# Altium PCB PCB_Nucleo.PcbDoc
Units mm, origin at the board's own origin, x right, y up, seen from the top; angles counter-clockwise.
Board outline 152.4 x 101.6 mm, 4 copper layers (Top Layer, GND, +3V3, Bottom Layer), stack 0.603 mm thick; 63 components, 70 nets, 278 pads, 0 vias.
Unrouted connection lines stored in the file: 152.
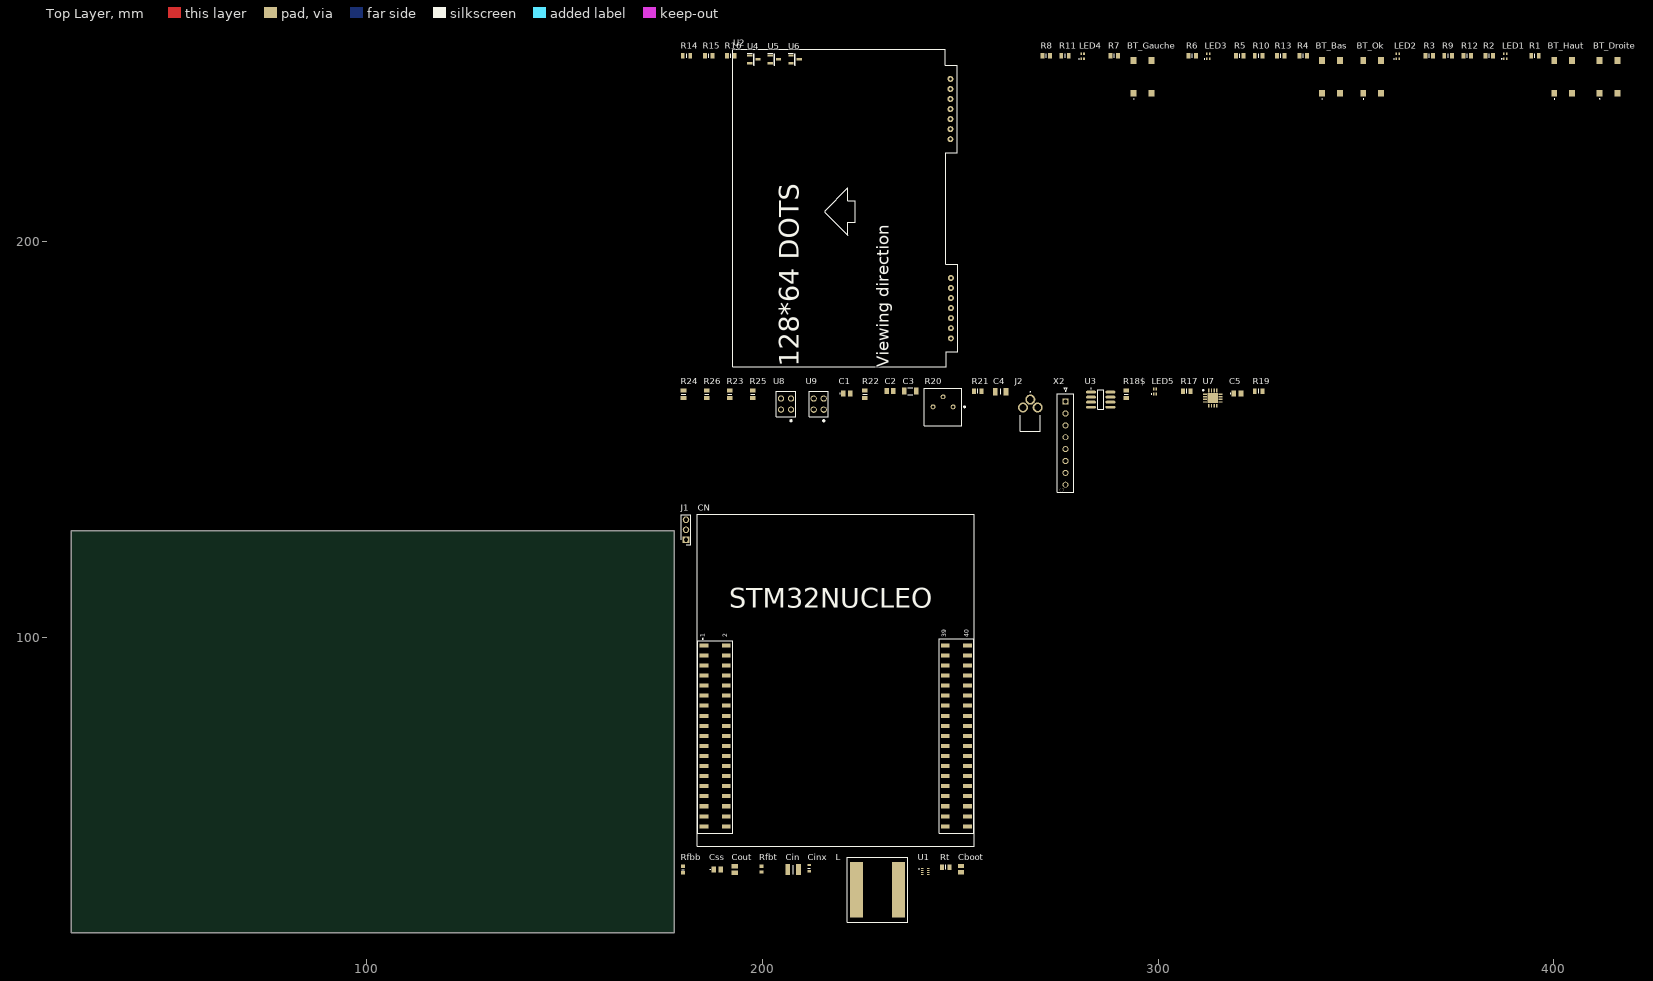
[diagram p0: Top Layer view]
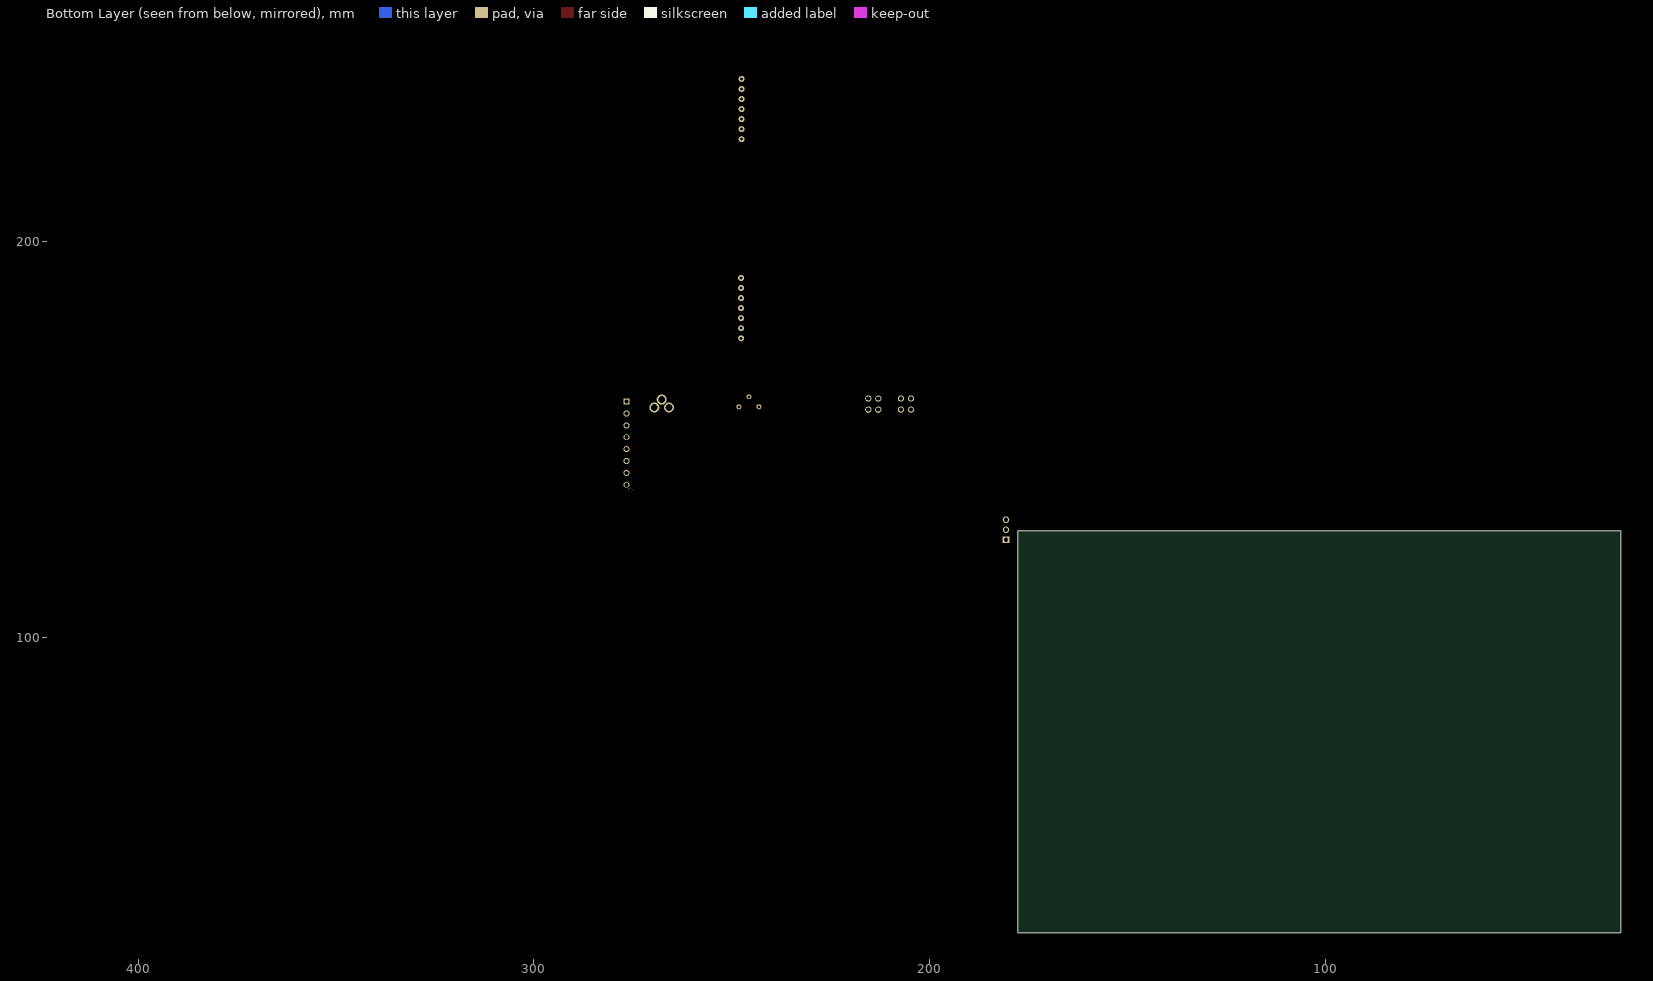
[diagram p1: Bottom Layer view, seen from below]

## Layer stack, top to bottom
Top Solder: solder mask 0.0102, Solder Resist, Dk 3.5
Top Layer: signal copper 0.0356
Dielectric 2: prepreg 0.0711, PP-006, Dk 4.1
GND: signal copper 0.035
Dielectric 1: dielectric 0.32, FR-4, Dk 4.8
+3V3: signal copper 0.035
Dielectric 3: prepreg 0.0711, PP-006, Dk 4.1
Bottom Layer: signal copper 0.0356
Bottom Solder: solder mask 0.0102, Solder Resist, Dk 3.5

## Board outline
25.4,25.4 177.8,25.4 177.8,127 25.4,127

## Design rules (kind name [scope] priority, off if disabled: settings)
Clearance [All] p1: gap=0.2 ignorepadtopadclearanceinfootprint=FALSE
MinimumAnnularRing [All] p1: minimumring=0.4
PolygonConnect [All] p1: connectstyle=Relief reliefconductorwidth=0.254 reliefentries=4 polygonreliefangle="90 Angle" airgapwidth=0.254
RoomDefinition IO_Carte_Nucleo_ [InComponentClass('IO_Carte_Nucleo_')] p1: confinementstyle=ConfineIn formatcopy=TRUE lockcomponents=FALSE outline 178.943,167.259 423.037,167.259 423.037,250.698 178.943,250.698
RoomDefinition IO_Carte_Nucleo2_ [InComponentClass('IO_Carte_Nucleo2_')] p2: confinementstyle=ConfineIn formatcopy=TRUE lockcomponents=FALSE outline 178.943,135.255 328.168,135.255 328.168,165.989 178.943,165.989
RoomDefinition Connecteur_Nucleo [InComponentClass('Connecteur_Nucleo')] p3: confinementstyle=ConfineIn formatcopy=TRUE lockcomponents=FALSE outline 178.943,46.99 253.873,46.99 253.873,134.112 178.943,134.112
RoomDefinition Alimentation [InComponentClass('Alimentation')] p4: confinementstyle=ConfineIn formatcopy=TRUE lockcomponents=FALSE outline 178.943,26.924 256.54,26.924 256.54,45.72 178.943,45.72
RoutingVias [All] p1: holewidth=0.25 width=0.6 viastyle="Through Hole" minholewidth=0.25 minwidth=0.6 maxholewidth=0.25 maxwidth=0.6
SolderMaskExpansion [All] p1: expansion=0.102 istentingtop=FALSE
Width [All] p1: maxlimit=0.2 minlimit=0.2 preferedwidth=0.2
30 further rules are at their usual default settings.

## Classes and differential pairs
component class IO_Carte_Nucleo_: BT_Bas BT_Droite BT_Gauche BT_Haut BT_Ok Joystick LED1 LED2 LED3 LED4 R1 R2 R3 R4 R5 R6 R7 R8 R9 R10 R11 R12 R13 R14 R15 R16 U2 U4 U5 U6
component class IO_Carte_Nucleo2_: C1 C2 C3 C4 C5 J2 LED5 R17 R18$ R19 R20 R21 R22 R23 R24 R25 R26 U U3 U7 U8 U9 X2
component class Connecteur_Nucleo: CN J1
component class Alimentation: Cboot Cin Cinx Cout Css L Rfbb Rfbt Rt U1

## Components (designator, comment, footprint, x,y, rotation, side; value= is the part's Value field where it differs from the comment)
BT_Bas "TS05-66-50-BK-260-SMT-67" TS056650BK260SMT67 343.662,241.681 r90 top
BT_Droite "TS05-66-50-BK-260-SMT-67" TS056650BK260SMT67 413.766,241.681 r90 top
BT_Gauche "TS05-66-50-BK-260-SMT-67" TS056650BK260SMT67 296.037,241.681 r90 top
BT_Haut "TS05-66-50-BK-260-SMT-67" TS056650BK260SMT67 402.336,241.681 r90 top
BT_Ok "TS05-66-50-BK-260-SMT-67" TS056650BK260SMT67 354.076,241.681 r90 top
C1 "C0805X474K3RACAUTO7210" C0805 221.361,161.671 r0 top
C2 "C0805X105K5RACAUTO" CAPC2012X145N 232.283,162.306 r0 top
C3 "12065C503JAT2A" CAPC3216X94N 237.363,162.306 r0 top
C4 "GRM31CR60J227ME11L" CAPC3216X190N 260.223,162.179 r0 top
C5 "C0805X474K3RACAUTO7210" C0805 320.04,161.671 r0 top
Cboot "C0805C104K5RAC7411" CAPC2012X88N 250.19,41.529 r90 top
Cin "UMR325AC7106MM-P" CAPC3225X280N 207.772,41.402 r0 top
Cinx "CGA3E2X7R1H104K080AA" CAPC1608X90N 211.836,41.783 r90 top
CN "" "Nucleo-conn-SMD - sans 3D" 218.567,75.184 r0 top
Cout "GRM21BR60G107ME15L" CAPC2012X145N 193.04,41.402 r90 top
Css "C0805C333J2RACTU" C0805 188.595,41.402 r0 top
J1 "XJ8B-0311" HDRV3W64P0X254_1X3_760X250X580P 180.721,124.714 r90 top
J2 "MJ1-2503A" MJ12503A 267.716,160.147 r90 top
L "74439370100" 74439370100 229.108,36.322 r90 top
LED1 "HSMF-C165" HSMF-C163 387.731,246.888 r90 top
LED2 "HSMF-C165" HSMF-C163 360.553,246.888 r90 top
LED3 "HSMF-C165" HSMF-C163 312.674,246.888 r90 top
LED4 "HSMF-C165" HSMF-C163 280.924,246.888 r90 top
LED5 "HSMF-C165" HSMF-C163 299.212,162.179 r90 top
R1 "CR0805-FX-1200ELF" RESC2012X60N 395.224,247.015 r0 top
R2 "CR0805-FX-1200ELF" RESC2012X60N 383.667,247.015 r0 top
R3 "CR0805-FX-1200ELF" RESC2012X60N 368.554,247.015 r0 top
R4 "CR0805-FX-1200ELF" RESC2012X60N 336.677,247.015 r0 top
R5 "CR0805-FX-1200ELF" RESC2012X60N 320.675,247.015 r0 top
R6 "CR0805-FX-1200ELF" RESC2012X60N 308.61,247.015 r0 top
R7 "CR0805-FX-1200ELF" RESC2012X60N 288.925,247.015 r0 top
R8 "CR0805-FX-1200ELF" RESC2012X60N 271.78,247.015 r0 top
R9 "CR0805-JW-103ELF" RESC2012X60N 373.253,247.015 r0 top
R10 "CR0805-JW-103ELF" RESC2012X60N 325.374,247.015 r0 top
R11 "CR0805-JW-103ELF" RESC2012X60N 276.479,247.015 r0 top
R12 "CR0805-JW-103ELF" RESC2012X60N 378.079,247.015 r0 top
R13 "CR0805-JW-103ELF" RESC2012X60N 330.962,247.015 r0 top
R14 "CR0805-JW-103ELF" RESC2012X60N 180.848,247.015 r0 top
R15 "CR0805-JW-103ELF" RESC2012X60N 186.436,247.015 r0 top
R16 "CR0805-JW-103ELF" RESC2012X60N 192.024,247.015 r0 top
R17 "CR0805-FX-1200ELF" RESC2012X60N 307.213,162.306 r0 top
R18$ "CR0805-FX-1200ELF" RESC2012X60N 291.973,161.544 r90 top
R19 "CR0805-JW-103ELF" RESC2012X60N 325.374,162.306 r0 top
R20 "3386P-1-103LF" 3386P_1 240.919,153.543 r0 top
R21 "CRCW08050000Z0EAC" RESC2012X60N 254.381,162.306 r0 top
R22 "CHP0805AFX-10R0ELF" RESC2012X60N 225.933,161.544 r90 top
R23 "CR0805-FX-1000ELF" RESC2012X60N 191.77,161.544 r90 top
R24 "CR0805-JW-103ELF" RESC2012X60N 180.086,161.544 r90 top
R25 "CR0805-FX-1000ELF" RESC2012X60N 197.612,161.544 r90 top
R26 "CR0805-JW-103ELF" RESC2012X60N 185.928,161.544 r90 top
Rfbb "CRCW060310K0FKEAC" RESC1608X55N 179.959,41.402 r90 top
Rfbt "CRCW060330K9FKEA" RESC1608X50N 199.771,41.529 r90 top
Rt "CR0805-FX-6192ELF" RESC2012X60N 246.38,42.037 r0 top
U1 "TPS62932DRLR" TPS62932DRLR 241.173,40.894 r0 top
U2 "NHD-C12864A1Z-FS(RGB)-FBW-HT1" NHD-C12864A1Z-FS(RGB)-FBW-HT1 247.396,178.435 r90 top
U3 "LM386M-1/NOPB" TI-D8_M 285.496,160.147 r0 top
U4 "IRLML6344TRPBF" SOT95P237X112-3N 197.866,246.126 r0 top
U5 "IRLML6344TRPBF" SOT95P237X112-3N 203.073,246.126 r0 top
U6 "IRLML6344TRPBF" SOT95P237X112-3N 208.28,246.126 r0 top
U7 "ADXL335BCPZ-RL7" QFN65P400X400X150-17N-D 313.817,160.528 r0 top
U8 "ITR-20001_T" ITR20001T 207.264,157.607 r90 top
U9 "ITR-20001_T" ITR20001T 215.519,157.607 r90 top
X2 "216571-2008" 216571-YY08 276.606,159.639 r90 top

## Footprints (in the part's own frame and the unit in brackets; to place one, negate y for a bottom-side part, rotate by r counter-clockwise, add the part's x,y. Pads: shape width x height; smd on the part's side, far side on the other; paste and mask are expansions set on the pad)
3386P_1 [mm]
  round 1.25 hole 0.75: 1(7.305,4.78) 2(4.765,7.32) 3(2.225,4.78)
  silkscreen extent 0,0 10.36,9.53
216571-YY08 [mm]
  rect 1.52x1.52 hole 1.02: 1(0,0)
  round 1.52 hole 1.02: 2(-3,0) 3(-6,0) 4(-9,0) 5(-12,0) 6(-15,0) 7(-18,0) 8(-21,0)
  round 1.02 hole 1.02 unplated: 9(-22.28,0.98)
  silkscreen extent -22.93,-2.09 3.5,2.09, body extent -22.93,-2.09 3.25,2.09, height 10.01
74439370100 [mm]
  rect 14.1x3.3 smd: 1(0,-5.3) 2(0,5.3)
  silkscreen extent -8.2,-7.7 8.2,7.7, body extent -8.2,-7.7 8.2,7.7, height 10.1
C0805 [mm]
  rect 1.15x1.45 smd: 1(-0.9,0) 2(0.9,0)
  silkscreen extent -1.8,-0.05 -1.7,0.05, body extent -1.15,-0.78 1.15,0.77, height 0.98
CAPC1608X90N [mm]
  rect 0.54x0.94 smd: 1(-0.8,0) 2(0.8,0)
  silkscreen extent 0,-0.3 0,0.3, body extent -0.8,-0.4 0.8,0.4, height 0.9
CAPC2012X88N [mm]
  rect 1.02x1.47 smd: 1(-0.8,0) 2(0.8,0)
  body extent -1,-0.63 1,0.63, height 0.88
CAPC2012X145N [mm]
  rect 1.14x1.57 smd: 1(-0.81,0) 2(0.81,0)
  body extent -1.17,-0.78 1.18,0.77, height 1.45
CAPC3216X94N [mil]
  rect 44x71 smd: 1(-59,0) 2(59,0)
  silkscreen extent -24,-35 24,35
CAPC3216X190N [mm]
  rect 1.22x1.92 smd: 1(-1.35,0) 2(1.35,0)
  silkscreen extent 0,-0.7 0,0.7, body extent -1.6,-0.8 1.6,0.8, height 1.9
CAPC3225X280N [mm]
  rect 1.22x2.82 smd: 1(-1.35,0) 2(1.35,0)
  silkscreen extent 0,-1.15 0,1.15, body extent -1.6,-1.25 1.6,1.25, height 2.8
HDRV3W64P0X254_1X3_760X250X580P [mm]
  rect 1.65x1.65 hole 1.1: 1(0,0)
  round 1.65 hole 1.1: 2(2.54,0) 3(5.08,0)
  silkscreen extent -1.26,-1.25 6.34,1.25, body extent -1.26,-1.25 6.34,1.25, height 5.8
HSMF-C163 [mm]
  rect 0.7x0.4 smd: 1(-0.65,0.35) 2(-0.65,-0.35) 3(0.65,0.35) 4(0.65,-0.35)
  silkscreen extent -0.72,0.83 -0.58,0.97
ITR20001T [mm]
  round 1.575 hole 1.05: 1(0,0) 2(0,2.54) 3(2.8,2.54) 4(2.8,0)
  silkscreen extent -3,-1.18 4.6,3.72, body extent -1.8,-1.18 4.6,3.72, height 6.9
MJ12503A [mm]
  round 2.55 hole 1.7: 1(0,0) 2(-2,-1.85) 3(-2,1.85)
  round 0.6 hole 1.2 unplated: MH1(-4.5,0)
  silkscreen extent -8,-2.5 2,2.5, body extent -11,-2.6 0.75,2.6, height 5.1
NHD-C12864A1Z-FS(RGB)-FBW-HT1 [mil]
  round 60 hole 30: 1(-110,-10) 2(-10,-10) 3(90,-10) 4(190,-10) 5(290,-10) 6(390,-10) 7(490,-10) 8(1870,-5) 9(1970,-5) 10(2070,-5) 11(2170,-5) 12(2270,-5) 13(2370,-5) 14(2470,-5)
  silkscreen extent -395,-80 2765,2160
"Nucleo-conn-SMD - sans 3D" [mm] "Interface Nucleo morpho connectors"
  rect 2.22x1.02 smd: 1(-33.306,22.86) 2(-27.654,22.86) 3(-33.306,20.32) 4(-27.654,20.32) 5(-33.306,17.78) 6(-27.654,17.78) 7(-33.306,15.24) 8(-27.654,15.24) 9(-33.306,12.7) 10(-27.654,12.7) 11(-33.306,10.16) 12(-27.654,10.16) 13(-33.306,7.62) 14(-27.654,7.62) 15(-33.306,5.08) 16(-27.654,5.08) 17(-33.306,2.54) 18(-27.654,2.54) 19(-33.306,0) 20(-27.654,0) 21(-33.306,-2.54) 22(-27.654,-2.54) 23(-33.306,-5.08) 24(-27.654,-5.08) 25(-33.306,-7.62) 26(-27.654,-7.62) 27(-33.306,-10.16) 28(-27.654,-10.16) 29(-33.306,-12.7) 30(-27.654,-12.7) 31(-33.306,-15.24) 32(-27.654,-15.24) 33(-33.306,-17.78) 34(-27.654,-17.78) 35(-33.306,-20.32) 36(-27.654,-20.32) 37(-33.306,-22.86) 38(-27.654,-22.86) 39(27.654,22.86) 39(27.654,22.86) 40(33.306,22.86) 41(27.654,20.32) 42(33.306,20.32) 43(27.654,17.78) 44(33.306,17.78) 45(27.654,15.24) 46(33.306,15.24) 47(27.654,12.7) 48(33.306,12.7) 49(27.654,10.16) 50(33.306,10.16) 51(27.654,7.62) 52(33.306,7.62) 53(27.654,5.08) 54(33.306,5.08) 55(27.654,2.54) 56(33.306,2.54) 57(27.654,0) 58(33.306,0) 59(27.654,-2.54) 60(33.306,-2.54) 61(27.654,-5.08) 62(33.306,-5.08) 63(27.654,-7.62) 64(33.306,-7.62) 65(27.654,-10.16) 66(33.306,-10.16) 67(27.654,-12.7) 68(33.306,-12.7) 69(27.654,-15.24) 70(33.306,-15.24) 71(27.654,-17.78) 72(33.306,-17.78) 73(27.654,-20.32) 74(33.306,-20.32) 75(27.654,-22.86) 76(33.306,-22.86)
  silkscreen extent -35,-27.94 35,56.03, body extent -34.02,-24.16 33.97,24.1, height 7.37
QFN65P400X400X150-17N-D [mm]
  rect 0.95x0.35 smd: 1(-1.95,0.975) 2(-1.95,0.325) 3(-1.95,-0.325) 4(-1.95,-0.975) 9(1.95,-0.975) 10(1.95,-0.325) 11(1.95,0.325) 12(1.95,0.975)
  rect 0.35x0.95 smd: 5(-0.975,-1.95) 6(-0.325,-1.95) 7(0.325,-1.95) 8(0.975,-1.95) 13(0.975,1.95) 14(0.325,1.95) 15(-0.325,1.95) 16(-0.975,1.95)
  rect 2.55x2.55 smd: 17(0,0)
  silkscreen extent -2.59,1.79 -2.26,2.11, body extent -2.05,-2.05 2.05,2.05, height 1.5
RESC1608X50N [mm]
  rect 0.85x1 smd: 1(-0.75,0) 2(0.75,0)
  body extent -0.79,-0.43 0.79,0.43, height 0.5
RESC1608X55N [mm]
  rect 0.9x0.95 smd: 1(-0.8,0) 2(0.8,0)
  silkscreen extent 0,-0.3 0,0.3, body extent -0.8,-0.4 0.8,0.4, height 0.55
RESC2012X60N [mm]
  rect 1x1.4 smd: 1(-0.95,0) 2(0.95,0)
  silkscreen extent 0,-0.53 0,0.53, body extent -1,-0.63 1,0.63, height 0.5
SOT95P237X112-3N [mm]
  rect 1.3x0.6 smd: 1(-1.05,0.95) 2(-1.05,-0.95) 3(1.05,0)
  silkscreen extent -1.7,-1.46 0.05,1.5, body extent -1.18,-1.46 1.18,1.46, height 1.12
TI-D8_M [mm] "SOIC, 8-Leads, Body 5x4mm, Pitch 1.27mm, IPC Low Density"
  oval 2.5x0.7 smd: 1(-2.45,1.905) 2(-2.45,0.635) 3(-2.45,-0.635) 4(-2.45,-1.905) 5(2.45,-1.905) 6(2.45,-0.635) 7(2.45,0.635) 8(2.45,1.905)
  silkscreen extent -2.57,-2.5 0.8,2.93, body extent -2,-2.5 2,2.5, height 1.75
TPS62932DRLR [mm]
  rect 0.67x0.3 smd: 1(-0.74,0.75) 2(-0.74,0.25) 3(-0.74,-0.25) 4(-0.74,-0.75) 5(0.74,-0.75) 6(0.74,-0.25) 7(0.74,0.25) 8(0.74,0.75)
  silkscreen extent -1.65,0.6 -1.55,0.7, body extent -0.6,-1.05 0.6,1.05, height 0.7
TS056650BK260SMT67 [mm]
  rect 1.75x1.5 smd: 1(-4.125,2.25) 2(-4.125,-2.25) 3(4.125,2.25) 4(4.125,-2.25)
  silkscreen extent -5.6,2.15 -5.5,2.25

## Part data
BT_Bas BT_Droite BT_Gauche BT_Haut BT_Ok: "6 x 6 mm, 4.3 ~ 8 mm Actuator Height, 100 ~ 260 gf, Surface Mount, IP67, SPST, Tactile Switch", Supplier Part Number 1=179-TS056650260SMT67, Datasheet Link=https://www.cuidevices.com/product/resource/ts05.pdf, Height=5.2mm, Supplier 1=Mouser
C1 C2 C5: "Capacitor", Manufacturer_Name=KEMET
  C1 C5: Datasheet Link=https://content.kemet.com/datasheets/KEM_C1078_X7R_FT-CAP_AUTO_SMD.pdf, Height=1.1mm, Manufacturer_Part_Number=C0805X474K3RACAUTO7210
  C2: Datasheet Link=https://connect.kemet.com:7667/gateway/IntelliData-ComponentDocumentation/1.0/download/specsheet/C0805X105K5RACAUTO, Height=1.45mm, Manufacturer_Part_Number=C0805X105K5RACAUTO
C3: "Capacitor", Manufacturer_Name=AVX, Manufacturer_Part_Number=12065C503JAT2A
C4: "Capacitor", Manufacturer_Name="Murata Electronics", Datasheet Link=https://www.murata.com/products/productdetail?partno=GRM31CR60J227ME11%23, Height=1.9mm, Manufacturer_Part_Number=GRM31CR60J227ME11L
Cboot: "Multilayer Ceramic Capacitors MLCC - SMD/SMT 50V 0.1uF X7R 0805 10%", Manufacturer_Name=KEMET, Mouser2 Part Number=80-C0805C104K5RACLR, Datasheet Link=https://componentsearchengine.com//C0805C104K5RAC7411.pdf, Height=0.88mm, Manufacturer_Part_Number=C0805C104K5RAC7411, Mouser2 Price/Stock=https://www.mouser.com/Search/Refine.aspx?Keyword=80-C0805C104K5RACLR, Supplier 1=Mouser, Supplier Part Number 1=80-C0805C104K5RACLR
Cin: "Capacitor 1210 50V 10uF +-20%", Manufacturer_Name="TAIYO YUDEN", Supplier Part Number 1=83AH3992, Height=2.8mm, Manufacturer_Part_Number=UMR325AC7106MM-P, Supplier 1=Newark
Cinx: "Capacitor 0603 100nF", Manufacturer_Name=TDK, Mouser2 Part Number=810-CGA3E2X7R1H104K, Supplier Part Number 1=9214481, Datasheet Link=https://componentsearchengine.com//CGA3E2X7R1H104K080AA.pdf, Height=0.9mm, Manufacturer_Part_Number=CGA3E2X7R1H104K080AA, Mouser2 Price/Stock=https://www.mouser.com/Search/Refine.aspx?Keyword=810-CGA3E2X7R1H104K, Supplier 1=RSComponents
CN: library part CN1, "Headers & Wire Housings Surface Mount PCB Socket Strips, 0.100 pitch", Supplier Part Number 1=81P6392, ComponentLink1Description="New link", Supplier 1=Newark
Cout: "0805 100 uF 4 V ±20% Tolerance X5R Multilayer Ceramic Chip Capacitor", Manufacturer_Name="Murata Electronics", Supplier Part Number 1=8072633, Datasheet Link=https://datasheet.datasheetarchive.com/originals/distributors/DKDS-10/192999.pdf, Height=1.45mm, Manufacturer_Part_Number=GRM21BR60G107ME15L, Supplier 1="Future Electronics"
Css: "Multilayer Ceramic Capacitors MLCC - SMD/SMT 200V 0.033uF X7R 0805 5%", Manufacturer_Name=KEMET, Supplier Part Number 1=80-C0805C333J2RACTU, Datasheet Link=https://content.kemet.com/datasheets/KEM_C1002_X7R_SMD.pdf, Height=1.1mm, Manufacturer_Part_Number=C0805C333J2RACTU, Supplier 1=Mouser
J1: "Conn Unshrouded Header PL 3 POS 2.54mm Solder ST Top Entry Thru-Hole", Manufacturer_Name="Omron Electronics", Datasheet Link=https://www.omron.com/ecb/products/pdf/en-xj8.pdf, Height=5.8mm, Manufacturer_Part_Number=XJ8B-0311, Supplier 1="Arrow Electronics", Supplier Part Number 1=XJ8B-0311
J2: "Connector", Manufacturer_Name="CUI Inc.", Mouser2 Part Number=490-MJ1-2503A, Datasheet Link=https://componentsearchengine.com//MJ1-2503A.pdf, Height=5mm, Manufacturer_Part_Number=MJ1-2503A, Mouser2 Price/Stock=https://www.mouser.com/Search/Refine.aspx?Keyword=490-MJ1-2503A
L: "Fixed Inductors WE-XHMI SMD 1510 10uH 11.5A 6.5mOhms", Manufacturer_Name="Wurth Elektronik", Supplier Part Number 1=92AH7077, Datasheet Link=https://componentsearchengine.com/Datasheets/1/74439370100.pdf, Height=10mm, Manufacturer_Part_Number=74439370100, Supplier 1=Newark
LED1 LED2 LED3 LED4: "Standard LEDs - SMD Grn/Red Bi-Color", Manufacturer_Name="Avago Technologies", Mouser2 Part Number=630-HSMF-C165, Supplier Part Number 1=450991P, Datasheet Link=https://componentsearchengine.com//HSMF-C165.pdf, Manufacturer_Part_Number=HSMF-C165, Mouser2 Price/Stock=https://www.mouser.com/Search/Refine.aspx?Keyword=630-HSMF-C165, Supplier 1=RSComponents
LED5: "LED Bi-Color Green/Red 570nm/636nm 4-Pin Chip 0603 T/R", Manufacturer_Name="Avago Technologies", Mouser2 Part Number=630-HSMF-C165, Supplier Part Number 1=450991P, Datasheet Link=https://componentsearchengine.com//HSMF-C165.pdf, Manufacturer_Part_Number=HSMF-C165, Mouser2 Price/Stock=https://www.mouser.com/Search/Refine.aspx?Keyword=630-HSMF-C165, Supplier 1=RSComponents
R1 R2 R3 R4 R5 R6 R7 R8: "Res Thick Film 0805 120 Ohm 1% 1/8W ±100ppm/°C Molded SMD SMD Paper Tape on Plastic Reel", Datasheet Link=https://www.bourns.com/pdfs/chpreztr.pdf, Height=0.6mm, Supplier 1="Arrow Electronics", Supplier Part Number 1=CR0805-FX-1200ELF
R9 R10 R11 R12 R13 R14 R15 R16 R19: "BOURNS         CR0805-JW-103ELF            Surface Mount Chip Resistor, Thick Film, CR Series, 10 kohm, 125 mW,  5%, 150 V", Datasheet Link=https://componentsearchengine.com//CR0805-JW-103ELF.pdf, Height=0.6mm, Supplier 1="Arrow Electronics", Supplier Part Number 1=CR0805-JW-103ELF
R17 R18$ R22 R23 R25: "Resistor", Manufacturer_Name=Bourns, Height=0.6mm
  R17 R18$: Datasheet Link=https://www.bourns.com/pdfs/chpreztr.pdf, Manufacturer_Part_Number=CR0805-FX-1200ELF
  R22: Datasheet Link=https://www.mouser.co.uk/datasheet/2/54/chp-a-1858677.pdf, Manufacturer_Part_Number=CHP0805AFX-10R0ELF
  R23 R25: Datasheet Link=https://www.bourns.com/pdfs/chpreztr.pdf, Manufacturer_Part_Number=CR0805-FX-1000ELF
R20: "Resistor", Manufacturer_Name=Bourns, Mouser2 Part Number=652-3386P-1-103LF, Datasheet Link=https://componentsearchengine.com//3386P-1-103LF.pdf, Manufacturer_Part_Number=3386P-1-103LF, Mouser2 Price/Stock=https://www.mouser.com/Search/Refine.aspx?Keyword=652-3386P-1-103LF
R21: "Resistor", Manufacturer_Name=Vishay, Mouser2 Part Number=71-CRCW08050000Z0EAC, Datasheet Link=https://componentsearchengine.com//CRCW08050000Z0EAC.pdf, Height=0.6mm, Manufacturer_Part_Number=CRCW08050000Z0EAC, Mouser2 Price/Stock=https://www.mouser.com/Search/Refine.aspx?Keyword=71-CRCW08050000Z0EAC
R24 R26: "Resistor", Manufacturer_Name=Bourns, Mouser2 Part Number=652-CR0805-JW-103ELF, Datasheet Link=https://componentsearchengine.com//CR0805-JW-103ELF.pdf, Height=0.6mm, Manufacturer_Part_Number=CR0805-JW-103ELF, Mouser2 Price/Stock=https://www.mouser.com/Search/Refine.aspx?Keyword=652-CR0805-JW-103ELF
Rfbb: "Res Thick Film 0603 10K Ohm 1% 1/10W ±100ppm/°C Molded SMD Paper T/R", Manufacturer_Name=Vishay, Mouser2 Part Number=71-CRCW060310K0FKEAC, Datasheet Link=https://componentsearchengine.com//CRCW060310K0FKEAC.pdf, Height=0.55mm, Manufacturer_Part_Number=CRCW060310K0FKEAC, Mouser2 Price/Stock=https://www.mouser.com/Search/Refine.aspx?Keyword=71-CRCW060310K0FKEAC, Supplier 1="Arrow Electronics", Supplier Part Number 1=CRCW060310K0FKEAC
Rfbt: "Res Thick Film 0603 30.9K Ohm 1% 1/10W ±100ppm/°C Molded SMD SMD Paper T/R", Manufacturer_Name=Vishay, Datasheet Link=http://www.vishay.com/docs/20035/dcrcwe3.pdf, Height=0.5mm, Manufacturer_Part_Number=CRCW060330K9FKEA, Supplier 1="Arrow Electronics", Supplier Part Number 1=CRCW060330K9FKEA
Rt: "Resistor 0805 61.9kOhm", Manufacturer_Name=Bourns, Datasheet Link=https://www.bourns.com/pdfs/chpreztr.pdf, Height=0.6mm, Manufacturer_Part_Number=CR0805-FX-6192ELF, Supplier 1=Avnet, Supplier Part Number 1=CR0805-FX-6192ELF
U1: "3.8-V to 30-V input, 2-A, 200-kHz to 2.2-MHz, low-IQ synchronous buck converter in SOT-583 package", Manufacturer_Name="Texas Instruments", Supplier Part Number 1=595-TPS62932DRLR, Datasheet Link=https://www.ti.com/lit/gpn/tps62932, Height=0.6mm, Manufacturer_Part_Number=TPS62932DRLR, Supplier 1=Mouser
U2: "LCD COG GRAPH 128X64 RGB BKLT", Supplier Part Number 1=NHD-C12864A1Z-FS(RGB)-FBW-HT1-ND, Supplier 1=Digi-Key
U3: library part CMP-0994-00001-1, "Low Voltage Audio Power Amplifier, 0 to 70 degC, 8-pin SOIC (D8), Green (RoHS & no Sb/Br)", Manufacturer="Texas Instruments", Code_JEDEC=MS-012, ComponentLink1Description="Manufacturer URL", ComponentLink1URL=http://www.ti.com/, ComponentLink2Description=Datasheet, ComponentLink2URL=http://www.ti.com/general/docs/lit/getliterature.tsp?genericPartNumber=LM386&fileType=pdf, ComponentLink3Description="Package Specification", ComponentLink3URL=http://www.ti.com/litv/pdf/msoi002j, DatasheetVersion=SNAS545A, Eco-Plan="Green (RoHS & no Sb/Br)", Input Type=Analog, Max. Number of Speaker Outputs=1, Mounting Technology="Surface Mount", PackageDescription="8-Pin Plastic Small Outline, Body 4.9 x 3.9 mm, Pitch 1.27 mm", PackageReference=D8, PackageVersion="4040047-3/M, 06/2011", PartNumber=LM386M-1/NOPB, SubFamily="Mid/High-Power Amplifier"
U4 U5 U6: "MOSFET (N-Channel)", Manufacturer_Name=Infineon, Mouser2 Part Number=942-IRLML6344TRPBF, Datasheet Link=https://componentsearchengine.com//IRLML6344TRPBF.pdf, Height=1.12mm, Manufacturer_Part_Number=IRLML6344TRPBF, Mouser2 Price/Stock=https://www.mouser.com/Search/Refine.aspx?Keyword=942-IRLML6344TRPBF
U7: "Integrated Circuit", Manufacturer_Name="Analog Devices", Mouser2 Part Number=584-ADXL335BCPZ-R7, Datasheet Link=https://componentsearchengine.com//ADXL335BCPZ-RL7.pdf, Height=1.5mm, Manufacturer_Part_Number=ADXL335BCPZ-RL7, Mouser2 Price/Stock=https://www.mouser.com/Search/Refine.aspx?Keyword=584-ADXL335BCPZ-R7
U8 U9: "Undefined or Miscellaneous", Manufacturer_Name=Everlight, Manufacturer_Part_Number=ITR-20001/T, Height=6.8mm
X2: "Connector", Manufacturer_Name=Molex, Datasheet Link=https://www.molex.com/pdm_docs/sd/2165711002_sd.pdf, Height=9.91mm, Manufacturer_Part_Number=216571-2008

## Nets (pads, with @x,y where several pads share a name; then routed paths per layer and width w, separated by ;. In a path a pad name is that pad's centre, name@x,y a point inside that pad or via, vN(x,y) a via of type N, cw(c..) or ccw(c..) an arc to the next point about the centre after c; other vN are vias at no path point)
+2V8: X2.2
+3V3: BT_Bas.1 BT_Droite.1 BT_Gauche.1 BT_Haut.1 BT_Ok.1 C5.1 CN.16 Cout.2 L.2 R17.2 R18$.2 R19.1 R23.1 R24.1 R25.1 R26.1 Rfbt.1 U2.4 U2.13 U7.14 U7.15 X2.1
+5V: C1.1 CN.18 U3.6
+24: Cin.1 Cinx.1 U1.3
ACC_X: CN.38 U7.12
ACC_Y: CN.53 U7.10
ACC_Z: CN.51 U7.8
AUDIO_OUT: CN.32 R20.1
BT_BAS: BT_Bas.2 CN.60 R10.1
BT_DROITE: BT_Droite.2 CN.56 R12.1
BT_ENTRER: BT_Ok.2 CN.57 R13.1
BT_GAUCHE: BT_Gauche.2 CN.63 R11.1
BT_HAUT: BT_Haut.2 CN.62 R9.1
BT_RES: CN.17 R19.2
BT_RX: CN.21
BT_TX: CN.55
GND: C1.2 C2.2 C5.2 Cin.2 Cinx.2 CN.8 CN.19 CN.20 CN.22 CN.47 CN.58 Cout.1 Css.2 J1.3 J2.1 LED1.3 LED1.4 LED2.3 LED2.4 LED3.3 LED3.4 LED4.3 LED4.4 R9.2 R10.2 R11.2 R12.2 R13.2 R14.2 R15.2 R16.2 R20.3 R22.2 Rfbb.2 Rt.2 U1.4 U2.1 U2.8 U2.14 U3.2 U3.4 U4.2 U5.2 U6.2 U7.2 U7.3 U7.5 U7.6 U7.7 U8.2 U8.3 U9.2 U9.3 X2.3
JOY_X: CN.35
JOY_Y: CN.36
LED1_G: CN.1 R1.1
LED1_R: CN.34 R2.1
LED2_G: CN.65 R3.1
LED2_R: CN.67 R4.1
LED3_G: CN.54 R5.1
LED3_R: CN.66 R6.1
LED4_G: CN.68 R7.1
LED4_R: CN.64 R8.1
LIDAR_GPIO: CN.41 X2.4
LIDAR_SADN: CN.43 X2.5
LIDAR_SCL: CN.59 X2.6
LIDAR_SDA: CN.71 X2.7
NetC2_1: C2.1 R20.2 U3.3
NetC3_1: C3.1 C4.1 U3.5
NetC3_2: C3.2 R22.1
NetC4_2: C4.2 J2.2 R21.1
NetCboot_1: Cboot.1 U1.6
NetCboot_2: Cboot.2 L.1 U1.5
NetCss_1: Css.1 U1.7
NetJ2_3: J2.3 R21.2
NetLED1_1: LED1.1 R1.2
NetLED1_2: LED1.2 R2.2
NetLED2_1: LED2.1 R3.2
NetLED2_2: LED2.2 R4.2
NetLED3_1: LED3.1 R5.2
NetLED3_2: LED3.2 R6.2
NetLED4_1: LED4.1 R7.2
NetLED4_2: LED4.2 R8.2
NetLED5_1: LED5.1 R18$.1
NetLED5_2: LED5.2 R17.1
NetLED5_3: LED5.3
NetLED5_4: LED5.4
NetR23_2: R23.2 U8.1
NetR25_2: R25.2 U9.1
NetRfbb_1: Rfbb.1 Rfbt.2 U1.8
NetRt_1: Rt.1 U1.1
NetU2_10: U2.10 U4.3
NetU2_11: U2.11 U5.3
NetU2_12: U2.12 U6.3
PHOTO_1: CN.37 R24.2 U8.4
PHOTO_2: CN.28 R26.2 U9.4
RX_debug: CN.44 J1.2
SCREEN_A0: CN.39 U2.5
SCREEN_BCKL_B: CN.42 R16.1 U6.1
SCREEN_BCKL_G: CN.2 R15.1 U5.1
SCREEN_BCKL_R: CN.3 R14.1 U4.1
SCREEN_CHIPSELECT: CN.61 U2.7
SCREEN_MOSI: CN.50 U2.3
SCREEN_RES: CN.52 U2.6
SCREEN_SCL: CN.30 U2.2
TX_debug: CN.72 J1.1
pads on no net: BT_Bas.3 BT_Bas.4 BT_Droite.3 BT_Droite.4 BT_Gauche.3 BT_Gauche.4 BT_Haut.3 BT_Haut.4 BT_Ok.3 BT_Ok.4 CN.4 CN.5 CN.6 CN.7 CN.9 CN.10 CN.11 CN.12 CN.13 CN.14 CN.15 CN.23 CN.24 CN.25 CN.26 CN.27 CN.29 CN.31 CN.33 CN.40 CN.45 CN.46 CN.48 CN.49 CN.69 CN.70 CN.73 CN.74 CN.75 CN.76 J2.MH1 U1.2 U2.9 U3.1 U3.7 U3.8 U7.1 U7.4 U7.9 U7.11 U7.13 U7.16 U7.17 X2.8 X2.9

## Text inside footprints (layer, text, board x,y; h text height)
CN: Top Overlay "STM32NUCLEO" at 191.643,107.496 h5; Top Overlay "2" at 191.548,100.105 h1.97 r90; Top Overlay "1" at 185.896,100.105 h1.97 r90; Top Overlay "40" at 252.508,100.105 h1.97 r90; Top Overlay "39" at 246.856,100.105 h1.97 r90; Mechanical 16 "1" at 185.896,100.105 h1.97 r90; Mechanical 16 "2" at 191.548,100.105 h1.97 r90; Mechanical 16 "40" at 252.508,100.105 h1.97 r90; Mechanical 16 "39" at 246.856,100.105 h1.97 r90
U2: Top Overlay "128*64 DOTS" at 209.169,168.402 h5 r90; Top Overlay "Viewing direction" at 231.902,168.275 h3 r90